# Altium PCB 2015PCB1.PcbDoc
Units mil, origin at the board's own origin, x right, y up, seen from the top; angles counter-clockwise.
Board outline 3930.03 x 2921.34 mil, 2 copper layers (Top Layer, Bottom Layer); 95 components, 169 nets, 484 pads, 42 vias.
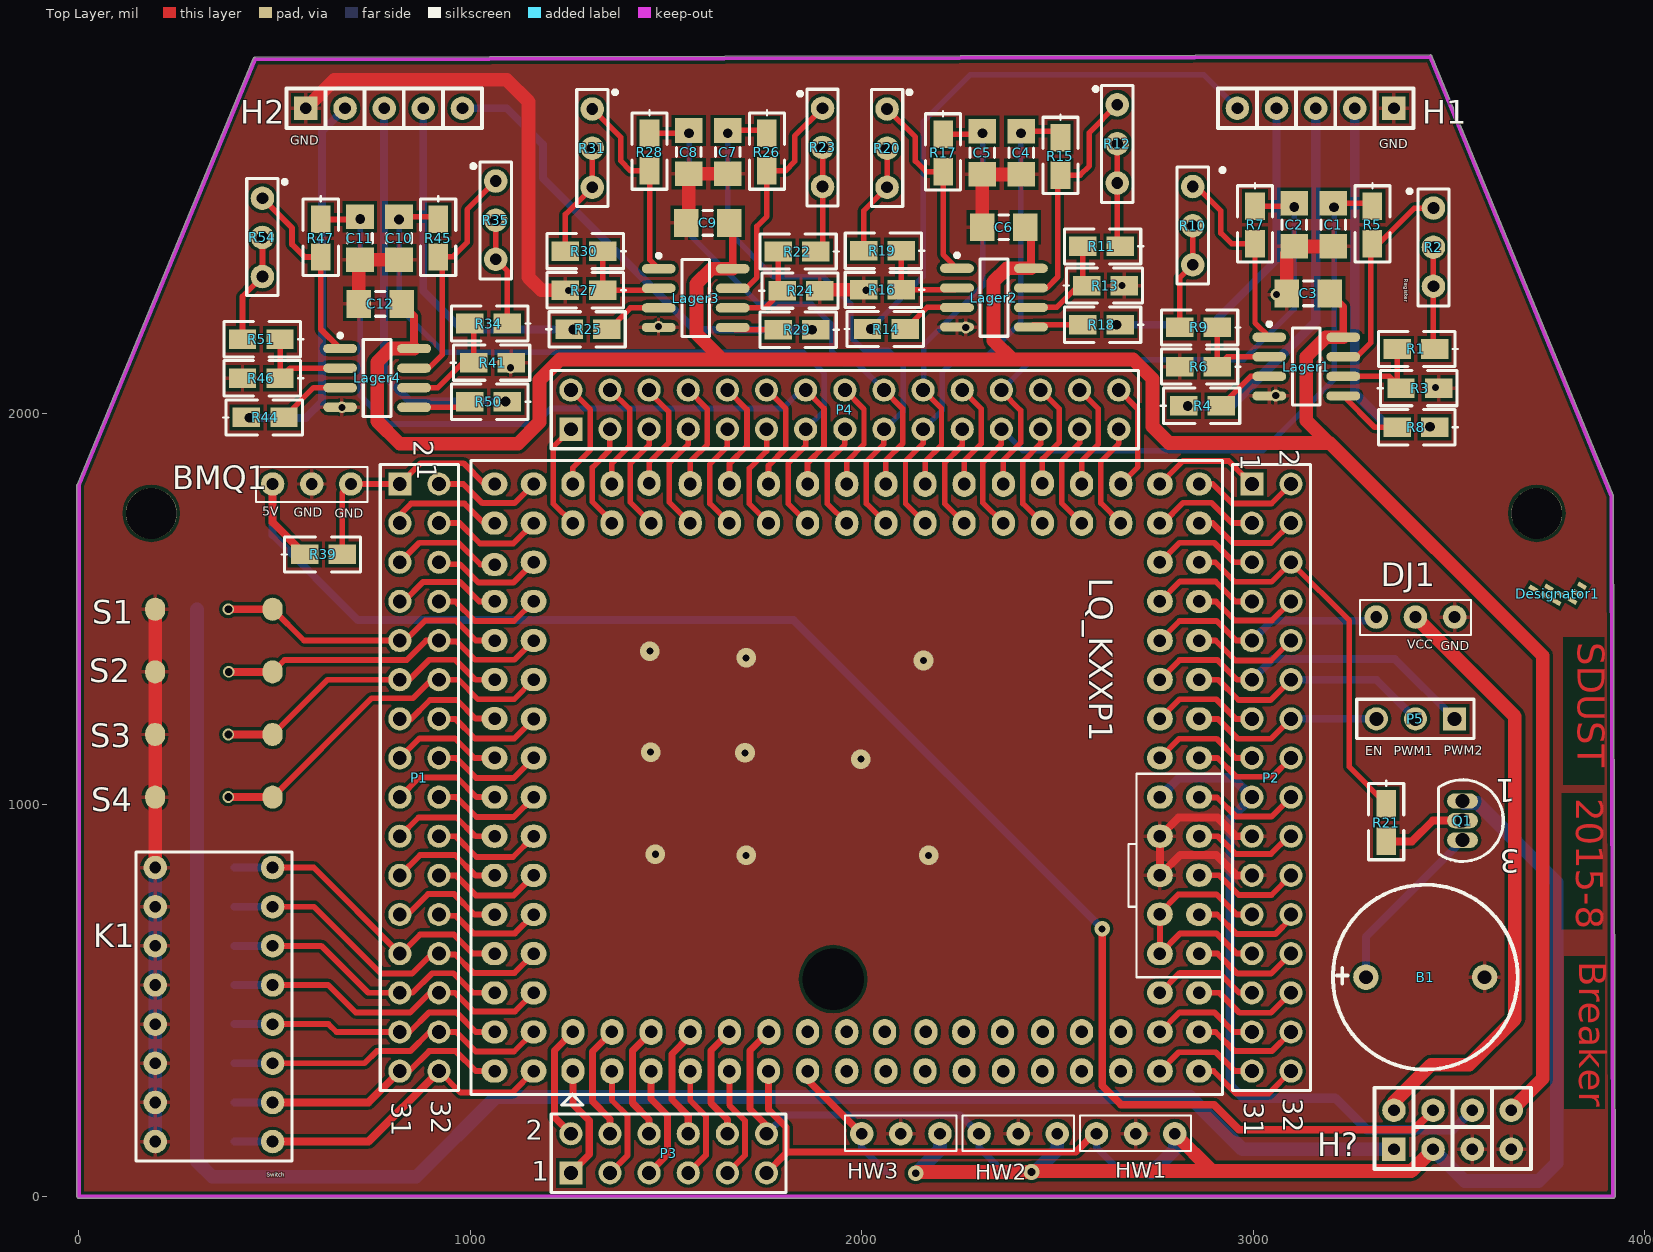
[diagram p0: Top Layer view]
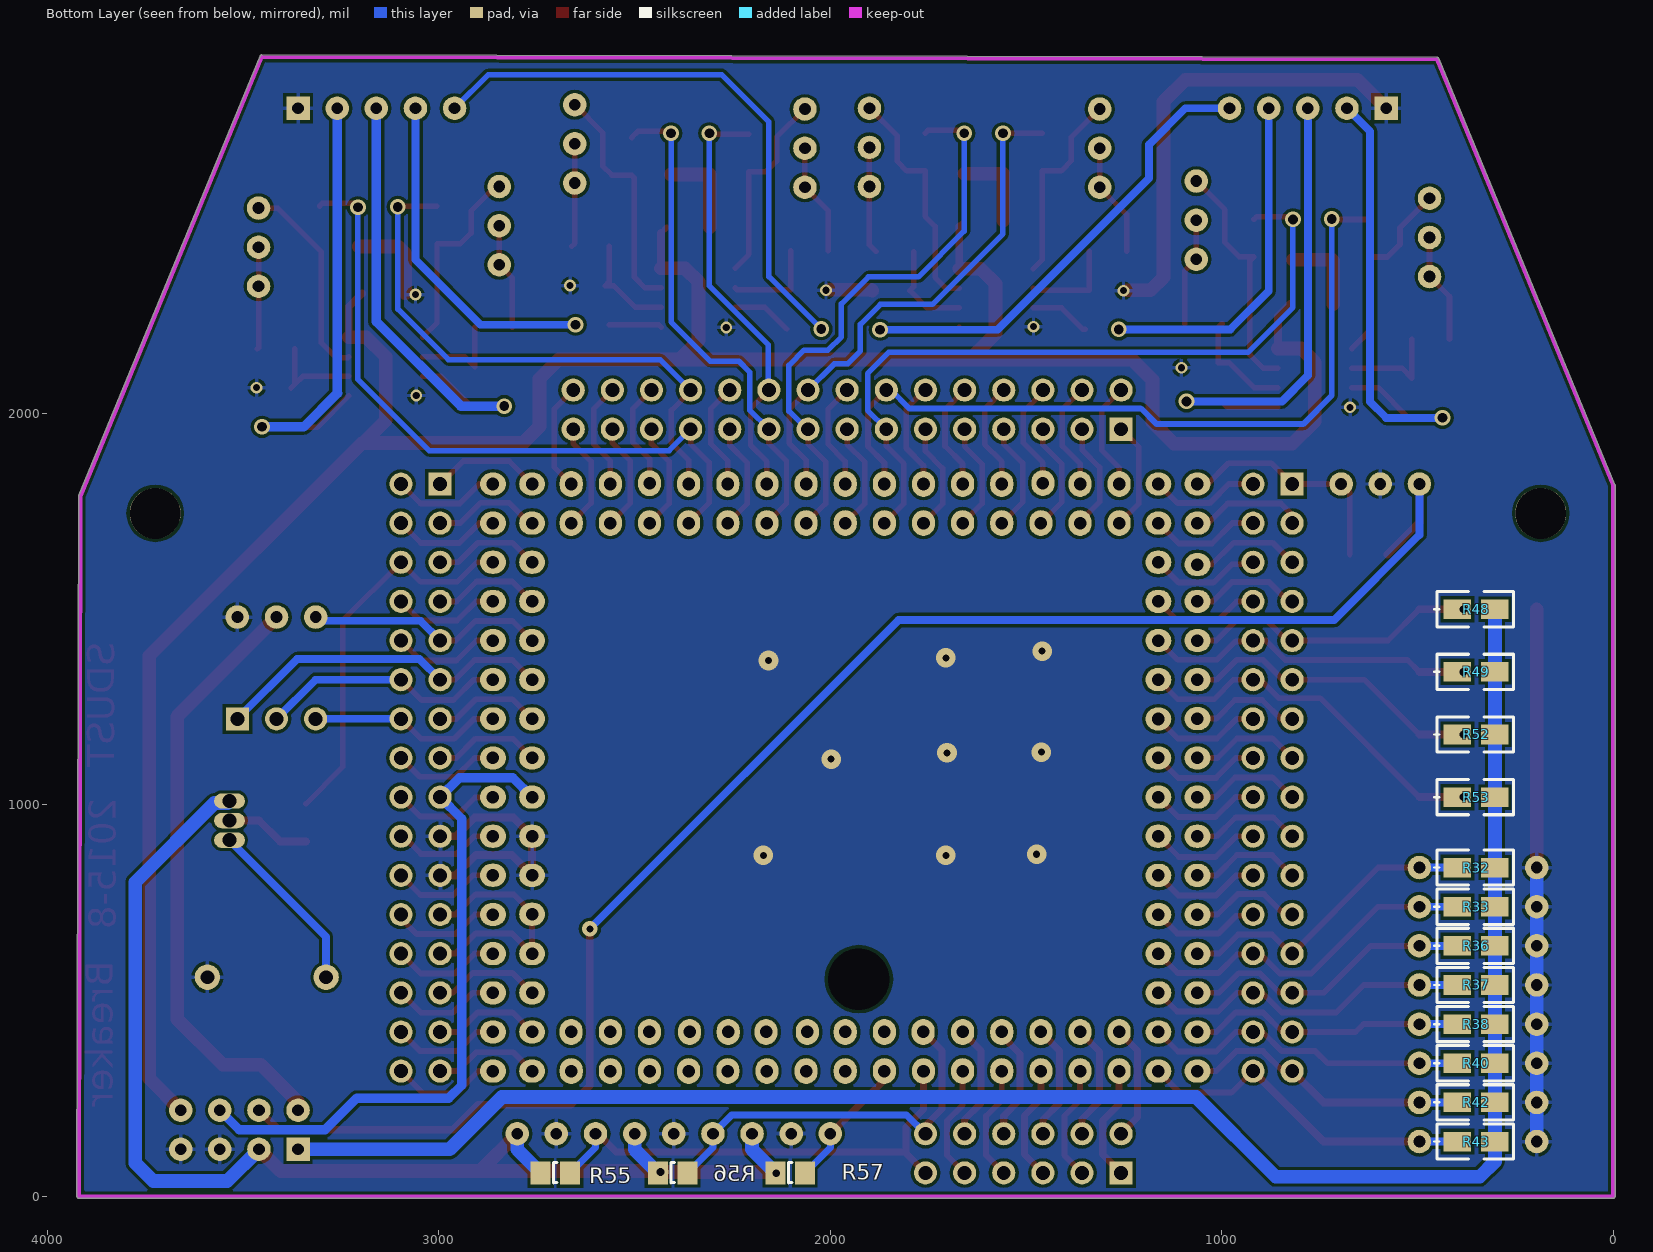
[diagram p1: Bottom Layer view, seen from below]

## Layer stack, top to bottom
Top Layer: signal copper 1.4
Dielectric: dielectric 12.6, FR-4, Dk 4.8
Bottom Layer: signal copper 1.4

## Board outline
-5.02,0 -5.02,1816.29 cw(c0,1816.29) -4.63,1818.21 445.37,2906.92 cw(c450,2905) 449.99,2910.02 3452.37,2916.32 cw(c3452.38,2911.31) 3457.02,2913.21 3457.02,2913.22 3457.02,2913.21 3920.34,1790.54 3920.35,1790.53 3920.34,1790.54 cw(c3915.71,1788.62) 3920.73,1788.63 cw(c3915.71,1788.62) 3920.73,1788.62 3920.73,1788.63 3925.02,0.01 cw(c3920,0) 3925.02,0 cw(c3920,0) 3920,-5.01 0,-5.01 cw(c0,0)

## Design rules (kind name [scope] priority, off if disabled: settings)
Clearance [All] p1: gap=8
ComponentClearance [All] p1: gap=2 collisioncheckmode=3 verticalgap=2 showdistances=FALSE
HoleSize [All] p1: absolutevalues=TRUE maxlimit=200 minlimit=1 maxpercent=80.000 minpercent=20.000
MinimumSolderMaskSliver [All] p1: minsoldermaskwidth=2
PlaneClearance [All] p1: clearance=18
PolygonConnect [All] p1: connectstyle=Relief reliefconductorwidth=10 reliefentries=4 polygonreliefangle="90 Angle"
RoutingVias [All] p1: holewidth=25 width=40 viastyle="Through Hole" minholewidth=18 minwidth=30 maxholewidth=25 maxwidth=50
SilkToSilkClearance [All] p1: silktosilkclearance=0
SilkscreenOverComponentPads [All] p1: minsilkscreentomaskgap=0
SolderMaskExpansion [All] p1: expansion=4
TestPointUsage [All] p1: valid=0 allowmultiple=FALSE
Testpoint [All] p1: side=15 testpointundercomponent=TRUE minsize=40 maxsize=100 preferedsize=60 minholesize=0 maxholesize=40 preferedholesize=32 testpointgrid=1 style=1023 order=0123456789
Width Width_signal_1 [InNetClass('signal_1')] p1: maxlimit=100 minlimit=10 preferedwidth=24
Width Width_signal [InNetClass('signal')] p2: maxlimit=20 minlimit=10 preferedwidth=18
Width Width_power [InNetClass('power')] p3: maxlimit=1000 minlimit=14 preferedwidth=35
18 further rules are at their usual default settings.

## Components (designator, comment, footprint, x,y, rotation, side; value= is the part's Value field where it differs from the comment)
B1 "BELL" bell 3440,560 r0 top
BMQ1 "HEADER" 干簧管 495,1820 r0 top
C1 "Cap" PCBComponent_1 3205,2427 r180 top
C2 "Cap" PCBComponent_1 3105,2427 r180 top
C3 "Cap" PCBComponent_1 3196,2307 r270 top
C4 "Cap" PCBComponent_1 2408,2611 r180 top
C5 "Cap" PCBComponent_1 2308,2611 r180 top
C6 "Cap" PCBComponent_1 2418,2476 r270 top
C7 "Cap" PCBComponent_1 1658,2613 r180 top
C8 "Cap" PCBComponent_1 1558,2613 r180 top
C9 "Cap" PCBComponent_1 1662,2487 r270 top
C10 "Cap" PCBComponent_1 818,2393 r180 top
C11 "Cap" PCBComponent_1 718,2393 r180 top
C12 "Cap" PCBComponent_1 825,2280 r270 top
Designator1 "Comment" FREESCALE 3840,1560 r270 top
DJ1 "HEADER" 干簧管 3315,1480 r0 top
H1 "HEADER" HEADER5 3360,2780 r180 top
H2 "HEADER" HEADER5 580,2780 r0 top
H? "HEADER4X2" HEADER4X2 3360,120 r0 top
HW1 "HEADER" 干簧管 2800,160 r180 top
HW2 "HEADER" 干簧管 2500,160 r180 top
HW3 "HEADER" 干簧管 2200,160 r180 top
K1 "拨码开关_8" 拨码开关 195,840 r0 top
Lager1 "2462" SOIC127P600X175-8N 3136,2120 r0 top
Lager2 "2462" SOIC127P600X175-8N 2338,2296 r0 top
Lager3 "2462" SOIC127P600X175-8N 1576,2295 r0 top
Lager4 "2462" SOIC127P600X175-8N 762,2091 r0 top
LQ_KXXP1 "LQ_KXXP144-SYSVG" LQ_KXXP144-SYSVG 1262,320 r0 top
P1 "Header 16X2" HDR2X16 820,1820 r270 top
P2 "Header 16X2" HDR2X16 2997,1820 r270 top
P3 "Header 6X2A" HDR2X6_CEN 1257,60 r0 top
P4 "Header 15X2A" HDR2X15_CEN 1257,1960 r0 top
P5 "Header 3" HDR1X3 3515,1220 r180 top
Q1 "NPN" TO-226 3535,960 r180 top
R1 "Res2" 0805#1 3461,2165 r180 top
R2 "47K" 精密可调电位器 3461,2525 r270 top
R3 "Res2" 0805#1 3381,2065 r0 top
R4 "Res2" 0805#1 2826,2020 r0 top
R5 "Res2" 0805#1 3305,2527 r270 top
R6 "Res2" 0805#1 2906,2120 r180 top
R7 "Res2" 0805#1 3005,2527 r270 top
R8 "Res2" 0805#1 3461,1965 r180 top
R9 "Res2" 0805#1 2906,2220 r180 top
R10 "47K" 精密可调电位器 2846,2380 r90 top
R11 "Res2" 0805#1 2658,2427 r180 top
R12 "47K" 精密可调电位器 2653,2789 r270 top
R13 "Res2" 0805#1 2578,2327 r0 top
R14 "Res2" 0805#1 2018,2216 r0 top
R15 "Res2" 0805#1 2508,2702 r270 top
R16 "Res2" 0805#1 2098,2316 r180 top
R17 "Res2" 0805#1 2208,2711 r270 top
R18 "Res2" 0805#1 2658,2227 r180 top
R19 "Res2" 0805#1 2098,2416 r180 top
R20 "47K" 精密可调电位器 2065,2578 r90 top
R21 "Res2" 0805#1 3340,1000 r270 top
R22 "Res2" 0805#1 1880,2414 r180 top
R23 "47K" 精密可调电位器 1900,2780 r270 top
R24 "Res2" 0805#1 1800,2314 r0 top
R25 "Res2" 0805#1 1256,2215 r0 top
R26 "Res2" 0805#1 1758,2713 r270 top
R27 "Res2" 0805#1 1336,2315 r180 top
R28 "Res2" 0805#1 1458,2713 r270 top
R29 "Res2" 0805#1 1880,2214 r180 top
R30 "Res2" 0805#1 1336,2415 r180 top
R31 "47K" 精密可调电位器 1312,2578 r90 top
R32 "Res2" 0805#1 395,840 r180 bottom
R33 "Res2" 0805#1 395,740 r180 bottom
R34 "Res2" 0805#1 1092,2230 r180 top
R35 "47K" 精密可调电位器 1065,2594 r270 top
R36 "Res2" 0805#1 395,640 r180 bottom
R37 "Res2" 0805#1 395,540 r180 bottom
R38 "Res2" 0805#1 395,440 r180 bottom
R39 "RES" 0805#1 580,1640 r0 top
R40 "Res2" 0805#1 395,340 r180 bottom
R41 "Res2" 0805#1 1012,2130 r0 top
R42 "Res2" 0805#1 395,240 r180 bottom
R43 "Res2" 0805#1 395,140 r180 bottom
R44 "Res2" 0805#1 431,1990 r0 top
R45 "Res2" 0805#1 918,2493 r270 top
R46 "Res2" 0805#1 511,2090 r180 top
R47 "Res2" 0805#1 618,2493 r270 top
R48 "Res2" 0805#1 395,1500 r180 bottom
R49 "Res2" 0805#1 395,1340 r180 bottom
R50 "Res2" 0805#1 1092,2030 r180 top
R51 "Res2" 0805#1 511,2190 r180 top
R52 "Res2" 0805#1 395,1180 r180 bottom
R53 "Res2" 0805#1 395,1020 r180 bottom
R54 "47K" 精密可调电位器 469,2350 r90 top
R55 "RES" 0805#2 2740,60 r180 bottom
R56 "RES" 0805#2 2440,60 r180 bottom
R57 "RES" 0805#2 2140,60 r180 bottom
S1 "SW-PB" 2012[0805] 455,1440 r0 top
S2 "SW-PB" 2012[0805] 455,1280 r0 top
S3 "SW-PB" 2012[0805] 455,1120 r0 top
S4 "SW-PB" 2012[0805] 455,960 r0 top

## Footprints (in the part's own frame and the unit in brackets; to place one, negate y for a bottom-side part, rotate by r counter-clockwise, add the part's x,y. Pads: shape width x height; smd on the part's side, far side on the other; paste and mask are expansions set on the pad)
0805#1 [mil]
  rect 70x50 smd: 1(-3,0) 2(93,0)
  silkscreen extent -62,-45 140,45
0805#2 [mil]
  rect 51.18x59.05 smd: 1(0,0) 2(74.8,0)
  silkscreen extent 33,-25 41,26
2012[0805] [mil] "Chip Resistor; Body 2.0 x 1.3 mm (LxW typ)"
  oval 51.18x59.06 smd: 1(-260,60) 2(40,60)
bell [mil]
  round 65 hole 35: 1(-151.57,0) 2(151.57,0)
  silkscreen extent -236,-236 236,236
FREESCALE [mm]
  rect 0.6x0.3 smd rot 60: 0(0,0) 1(0.475,-0.3) 2(0.975,-0.6) 3(0.55,-1.35) 4(1.05,-1.65) 5(0.125,-2.125) 6(0.625,-2.4) 7(0.2,-3.15)
HDR1X3 [mm] "Connector; Header; 3 Position"
  rect 1.5x1.5 hole 0.9: 1(0,0)
  round 1.5 hole 0.9: 2(2.54,0) 3(5.08,0)
  silkscreen extent -1.27,-1.27 6.35,1.27
HDR2X6_CEN [mm] "Connector; Header; 6x2 Position"
  rect 1.5x1.5 hole 0.9: 1(0,0)
  round 1.5 hole 0.9: 2(2.54,0) 3(5.08,0) 4(7.62,0) 5(10.16,0) 6(12.7,0) 7(0,2.54) 8(2.54,2.54) 9(5.08,2.54) 10(7.62,2.54) 11(10.16,2.54) 12(12.7,2.54)
  silkscreen extent -1.27,-1.27 13.97,3.81
HDR2X15_CEN [mm] "Connector; Header; 15x2 Position"
  rect 1.5x1.5 hole 0.9: 1(0,0)
  round 1.5 hole 0.9: 2(2.54,0) 3(5.08,0) 4(7.62,0) 5(10.16,0) 6(12.7,0) 7(15.24,0) 8(17.78,0) 9(20.32,0) 10(22.86,0) 11(25.4,0) 12(27.94,0) 13(30.48,0) 14(33.02,0) 15(35.56,0) 16(0,2.54) 17(2.54,2.54) 18(5.08,2.54) 19(7.62,2.54) 20(10.16,2.54) 21(12.7,2.54) 22(15.24,2.54) 23(17.78,2.54) 24(20.32,2.54) 25(22.86,2.54) 26(25.4,2.54) 27(27.94,2.54) 28(30.48,2.54) 29(33.02,2.54) 30(35.56,2.54)
  silkscreen extent -1.27,-1.27 36.83,3.81
HDR2X16 [mm] "Connector; Header; 16x2 Position"
  rect 1.5x1.5 hole 0.9: 1(0,0)
  round 1.5 hole 0.9: 2(0,2.54) 3(2.54,0) 4(2.54,2.54) 5(5.08,0) 6(5.08,2.54) 7(7.62,0) 8(7.62,2.54) 9(10.16,0) 10(10.16,2.54) 11(12.7,0) 12(12.7,2.54) 13(15.24,0) 14(15.24,2.54) 15(17.78,0) 16(17.78,2.54) 17(20.32,0) 18(20.32,2.54) 19(22.86,0) 20(22.86,2.54) 21(25.4,0) 22(25.4,2.54) 23(27.94,0) 24(27.94,2.54) 25(30.48,0) 26(30.48,2.54) 27(33.02,0) 28(33.02,2.54) 29(35.56,0) 30(35.56,2.54) 31(38.1,0) 32(38.1,2.54)
  silkscreen extent -1.27,-1.27 39.37,3.81
HEADER4X2 [mil]
  rect 60x60 hole 30: 1(0,0)
  round 60 hole 30: 2(100,0) 3(200,0) 4(300,0) 5(300,100) 6(200,100) 7(100,100) 8(0,100)
  silkscreen extent -50,-50 350,157
HEADER5 [mil]
  rect 60x60 hole 30: 1(0,0)
  round 60 hole 30: 2(100,0) 3(200,0) 4(300,0) 5(400,0)
  silkscreen extent -50,-50 450,50
LQ_KXXP144-SYSVG [mil]
  oval 59x66 hole 32: 1(0,0) 2(0,100) 3(100,0) 4(100,100) 5(200,0) 6(200,100) 7(300,0) 8(300,100) 9(400,0) 10(400,100) 11(500,0) 12(500.79,100) 13(600,0) 14(600,100) 15(700,0) 16(700,100) 17(800,0) 18(796.85,100) 19(900,0) 20(902.36,100) 21(1000,0) 22(998.82,100) 23(1100,0) 24(1097.64,100) 25(1200,0) 26(1200.39,100) 27(1300,0) 28(1300,100) 29(1400,0) 30(1400.39,100) 63(1400,1500) 64(1400,1400) 65(1300,1500) 66(1300,1400) 67(1200,1501.97) 68(1200,1400) 69(1100,1500) 70(1100,1400) 71(1000,1500) 72(1000,1400) 73(900,1500) 74(900,1400) 75(800,1500) 76(800,1400) 77(700,1500) 78(700,1400) 79(600,1500) 80(600,1400) 81(500,1500) 82(500,1400) 83(400,1500) 84(400,1400) 85(300,1500) 86(300,1400) 87(194.88,1502.36) 88(200,1400) 89(100,1500) 90(100,1400) 91(0,1500) 92(0,1400)
  oval 66x59 hole 32: 31(1500,0) 32(1600,0) 33(1500,100) 34(1600,100) 35(1500,200) 36(1600,200) 37(1500,300) 38(1600,300) 39(1500,400.79) 40(1600,400) 41(1500,500) 42(1600,500.39) 43(1500,600) 44(1600,600) 45(1500,700) 46(1600,700) 47(1500,800) 48(1600,800) 49(1500,900) 50(1600,900) 51(1500,1000) 52(1600,1000) 53(1500,1100) 54(1600,1100) 55(1500,1200) 56(1600,1200) 57(1500,1300) 58(1600,1300) 59(1500,1400) 60(1600,1400) 61(1500,1500) 62(1600,1500) 93(-100,1500) 94(-200,1500) 95(-100,1400) 96(-200,1400) 97(-100,1300) 98(-200,1294.09) 99(-100,1200) 100(-200,1200) 101(-100,1100) 102(-200,1100) 103(-100,1000) 104(-200,1000) 105(-100,899.61) 106(-200,900.39) 107(-100,800) 108(-200,800) 109(-100,700) 110(-200,700) 111(-100,600) 112(-200,600) 113(-100,500) 114(-200,500) 115(-100,400) 116(-200,400) 117(-100,300) 118(-200,300) 119(-100,200) 120(-200,200) 121(-100,100) 122(-200,100) 123(-100,0) 124(-200,0)
  silkscreen extent -260,-87 1660,1560
PCBComponent_1 [mm]
  rect 1.8x1.6 smd: 1(0,0) 2(0,-2.8)
  silkscreen extent -0.8,-1.7 0.8,-1.1
SOIC127P600X175-8N [mm] "SOIC, 8-Leads, Body 4.90x3.90mm, Pitch 1.27mm, IPC Medium Density"
  oval 2.2x0.6 smd: 1(-2.4,1.905) 2(-2.4,0.635) 3(-2.4,-0.635) 4(-2.4,-1.905) 5(2.4,-1.905) 6(2.4,-0.635) 7(2.4,0.635) 8(2.4,1.905)
  silkscreen extent -2.52,-2.5 0.9,2.88, body extent -2,-2.5 2,2.5, height 1.75
TO-226 [mm] "TO, Flat Index; 3 In-Line, Axial Leads; Body Dia. 4.8mm; Leads 0.55 x 0.51 mm (max)"
  oval 2x1 hole 0.9: 1(0,-1.27) 2(0,0) 3(0,1.27)
  silkscreen extent -2.65,-2.65 1.55,2.65
干簧管 [mil]
  round 60 hole 30: 1(0,0) 2(100,0) 3(200,0)
  silkscreen extent -42,-46 242,44
拨码开关 [mil]
  round 60 hole 30: 1(0,0) 2(0,-100) 3(0,-200) 4(0,-300) 5(0,-400) 6(0,-500) 7(0,-600) 8(0,-700) 9(300,-700) 10(300,-600) 11(300,-500) 12(300,-400) 13(300,-300) 14(300,-200) 15(300,-100) 16(300,0)
  silkscreen extent -49,-750 350,40
精密可调电位器 [mil]
  round 60 hole 30: 1(0,0) 2(100,0) 3(200,0)
  silkscreen extent -49,-40 250,40

## Part data
B1: library part bell, "直插蜂鸣器"
BMQ1 DJ1 HW1 HW2 HW3: library part HEADER3
C1 C2 C3 C4 C5 C6 C7 C8 C9 C10 C11 C12: "Capacitor"
H1 H2: library part HEADER5, "CCD接口"
Lager1 Lager2 Lager3 Lager4: library part BTS7970B_3, "驱动"
P1 P2: "Header, 16-Pin, Dual row"
P3: library part "Header 15X2", "Header, 15-Pin, Dual row"
P4: "Header, 15-Pin, Dual row"
P5: "Header, 3-Pin"
Q1: "NPN Bipolar Transistor"
R1 R3 R4 R5 R6 R7 R8 R9 R11 R13 R14 R15 R16 R17 R18 R19 R21 R22 R24 R25 R26 R27 R28 R29 R30 R32 R33 R34 R36 R37 R38 R40 R41 R42 R43 R44 R45 R46 R47 R48 R49 R50 R51 R52 R53: "Resistor"
R2 R10 R12 R20 R23 R31 R35 R54: library part 精密可调电位器
R39 R55 R56 R57: library part 0805-电阻
S1 S2 S3 S4: "Switch"

## Free pads (board coordinates)
  round 129.92 hole 129.92: 0(185,1745) 1(3725,1745)
  round 129.92 hole 157.48: 6(1927,555)

## Via types
v1: diameter 40, hole 25, Top Layer to Bottom Layer, 16 vias
v2: diameter 30, hole 18, Top Layer to Bottom Layer, 10 vias
v3: diameter 50, hole 18, Top Layer to Bottom Layer, 9 vias
v4: diameter 30, hole 20, Top Layer to Bottom Layer, 4 vias
v5: diameter 40, hole 20, Top Layer to Bottom Layer, 2 vias
v6: diameter 40, hole 18, Top Layer to Bottom Layer, 1 vias

## Nets (pads, with @x,y where several pads share a name; then routed paths per layer and width w, separated by ;. In a path a pad name is that pad's centre, name@x,y a point inside that pad or via, vN(x,y) a via of type N, cw(c..) or ccw(c..) an arc to the next point about the centre after c; other vN are vias at no path point)
0M1: LQ_KXXP1.18
0M3: LQ_KXXP1.24
0P1: LQ_KXXP1.17
0P3: LQ_KXXP1.23
0S16: LQ_KXXP1.27
1M1: LQ_KXXP1.20
1M3: LQ_KXXP1.22
1P1: LQ_KXXP1.19
1P3: LQ_KXXP1.21
1S16: LQ_KXXP1.26
1S18: LQ_KXXP1.28
3.3V: H?.1 R32.2 R33.2 R36.2 R37.2 R38.2 R40.2 R42.2 R43.2 R48.2 R49.2 R52.2 R53.2 | length 5825.2
  Bottom Layer w24: R43.2 R42.2 R40.2 R38.2 R37.2 R36.2 R33.2 R32.2 R53.2 R52.2 R49.2
  Bottom Layer w35: R48.2 R49.2 R52.2 R53.2 R32.2 R33.2 R36.2 R37.2 R38.2 R40.2 R42.2 R43.2 302,89 341,50 862,50 1066,254 2839,254 2973,120 H?.1
3.3V(D): H?.6 LQ_KXXP1.45 P2.17 | length 1746.2
  Top Layer w24: LQ_KXXP1.45 2773,1020 2774,1021 LQ_KXXP1.45@2774,1034
  Bottom Layer w24: LQ_KXXP1.45 2811.5,1069.5 2947.5,1069.5 P2.17 2941.97,964.97 2941.97,284.03 2975,251 3210,251 3291,170 3510,170 H?.6
5V(3): H?.2 HW1.1 HW2.1 HW3.1 Q1.1 R55.1 R56.1 R57.1 | length 3269
  Top Layer w35: v5(2138,59) 2141,62 v5(2434,62) ; v5@2434,64.5 2895.5,64.5 ; HW1.1 2895.5,64.5 ; H?.2 3404.5,64.5 2895.5,64.5
  Bottom Layer w35: R57.1 2200,120 HW3.1 ; R56.1 2500,120 HW2.1 ; R55.1 2800,120 HW1.1 ; H?.2 3541,39 3730,39 3776,85 3776,802.59 3573.4,1005.19 3539.81,1005.19 Q1.1
5V(B): BMQ1.1 H?.7 R39.1 | length 4194.2
  Top Layer w20: BMQ1.1 495,1722 R39.1 ; v6(2614.5,683.5) 2614.5,282.5 2663,234 2900,234 2964,170 3410,170 H?.7
  Bottom Layer w20: BMQ1.1 495,1690 712.53,1472.47 1825.53,1472.47 v6(2614.5,683.5)
5V(S): C3.1 C6.1 C9.1 C12.1 H?.5 Lager1.8 Lager2.8 Lager3.8 Lager4.8 | length 6494.2
  Top Layer w14: C9.1 C9.1@1670.49,2478.51 ; C6.1 C6.1@2432.49,2461.51
  Top Layer w20: C12.1 856.49,2248.51 Lager4.8 ; Lager3.8 C9.1@1670.49,2478.51 ; Lager2.8 C6.1@2432.49,2461.51 ; C3.1 3230.49,2272.51 Lager1.8
  Top Layer w35: Lager4.8 797,2166 762,2131 762,1981 820,1923 1122,1923 1177,1978 1177,2086 1229,2138 1644,2138 ; Lager3.8 1616,2370 1578,2332 1578,2204 1644,2138 ; Lager2.8 2371,2371 2337,2337 2337,2186 2385,2138 ; Lager1.8 3186,2195 3136,2145 3136,1982 3193,1925 ; H?.5 3660,221 3740,301 3740,1381 3196,1925 3193,1925 ; 1644,2138 2385,2138 ; 2385,2138 2694,2138 2743,2089 2743,1967 2785,1925 3193,1925
ADJ: DJ1.2 H?.8 | length 1550
  Top Layer w35: H?.8 3360,241 3455,336 3552,336 3669,453 3669,1226 DJ1.2
BAT: LQ_KXXP1.31 P2.31 | length 274.8
  Top Layer w15: LQ_KXXP1.31 2810,368 2905,368 2953,320 P2.31
DA0: LQ_KXXP1.29
DA1: LQ_KXXP1.30
DM: LQ_KXXP1.15
DP: LQ_KXXP1.14
GND: B1.2 BMQ1.2 C1.1 C2.1 C3.2 C4.1 C5.1 C6.2 C7.1 C8.1 C9.2 C10.1 C11.1 C12.2 DJ1.3 H1.1 H2.1 H?.3 H?.4 HW1.2 HW2.2 HW3.2 K1.1 K1.2 K1.3 K1.4 K1.5 K1.6 K1.7 K1.8 Lager1.4 Lager2.4 Lager3.4 Lager4.4 LQ_KXXP1.41 LQ_KXXP1.43 P2.19 P2.21 R3.2 R6.2 R13.2 R16.2 R24.2 R27.2 R41.2 R46.2 S1.1 S2.1 S3.1 S4.1 | length 4209.6
  Top Layer w20: P2.21 2958,820 2906,872 2814,872 LQ_KXXP1.41 LQ_KXXP1.43 2809.5,967.5 2909,967.5 2956.5,920 P2.19
  Top Layer w35: K1.1 S4.1 S3.1 S2.1 S1.1 ; H2.1 653,2853 1093,2853 1149,2797 1149,2348 1182,2315 R27.2 ; C12.2 C11.1@714.76,2389.76 ; C11.1 C10.1 ; C9.2@1558,2493.24 C8.1 C7.1 ; R24.2 1895,2316 R16.2 ; C6.2@2308,2476.24 C5.1 C4.1 ; C3.2 3085.76,2407.76 C2.1 C1.1
  Bottom Layer w20: BMQ1.2@595,1807 BMQ1.2
  Bottom Layer w35: K1.8 K1.7 K1.6 K1.5 K1.4 K1.3 K1.2 K1.1
  other v2: 672,2016 3058,2046 3466,2066 1103,2117 2266,2220 1481,2222 3060,2304 1251,2314 2011,2315 2665,2327
  other v3: 1705,871 2171,871 1473,874 1998,1117 1702,1133 1461,1135 2158,1369 1705,1376 1459,1393
NC: LQ_KXXP1.37 LQ_KXXP1.39 P2.23 P2.25 | length 665.5
  Top Layer w15: LQ_KXXP1.39 LQ_KXXP1.37 2814,672 2906,672 2958,620 P2.25 ; LQ_KXXP1.39@2762,724 2809,771 2907,771 2958,720 P2.23
  Top Layer w20: LQ_KXXP1.39@2762,724 LQ_KXXP1.39 LQ_KXXP1.39@2769.79,720.79
NetB1_1: B1.1 Q1.3 | length 452.1
  Bottom Layer w20: B1.1 3288.43,663.43 Q1.3
NetH1_2: H1.2 R8.1 | length 957.2
  Bottom Layer w24: H1.2 3260,2053.33 3258.83,2052.17 3345,1966 v1(3452,1966)
NetH1_3: H1.3 R4.1 | length 961.5
  Bottom Layer w24: v1(2833,2019) 2944,2019 3160,2235 H1.3
NetH1_4: H1.4 R18.1 | length 864.8
  Bottom Layer w20: v1(2651,2227) 2894,2227 3060,2393 H1.4
NetH1_5: H1.5 R14.1 | length 1473.2
  Bottom Layer w14: v1(2023,2216) 2157,2350 2157,2745 2278,2866 2874,2866 H1.5
NetH2_2: H2.2 R44.1 | length 976.4
  Bottom Layer w20: v1(436,1989) 580,1989 621,2030 621,2721 H2.2
NetH2_3: H2.3 R50.1 | length 1020.3
  Bottom Layer w20: H2.3 780,2097 846,2031 v1(1090,2031)
NetH2_4: H2.4 R25.1 | length 890.6
  Bottom Layer w20: H2.4 880,2313 978,2215 v1(1263,2215)
NetH2_5: H2.5 R29.1 | length 1177.8
  Bottom Layer w20: H2.5 1093,2780 1186,2687 1186,2601 1573,2214 v1(1873,2214)
NetLager1_1: Lager1.1 R7.2 R10.3 | length 507
  Top Layer w14: R10.3 2856,2580 2918,2518 2918,2461 2945,2434 R7.2 3005,2231.51 Lager1.1
NetLager1_2: Lager1.2 R6.1 R9.1 | length 242.9
  Top Layer w14: R9.1 R6.1 2934,2145 Lager1.2
NetLager1_3: Lager1.3 R4.2 | length 153.6
  Top Layer w14: R4.2 2994,2095 Lager1.3
NetLager1_5: Lager1.5 R8.2 | length 170.6
  Top Layer w14: Lager1.5 3310.49,1965 R8.2
NetLager1_6: Lager1.6 R1.2 R3.1 | length 249.9
  Top Layer w14: Lager1.6 3348,2095 R3.1@3368,2075 ; R1.2 R3.1@3368,2075 ; R3.1 R3.1@3368,2075
NetLager1_7: Lager1.7 R2.1 R5.2 | length 526.9
  Top Layer w14: Lager1.7 3233.49,2142 3262,2142 3301,2181 3301,2414 3412,2525 R2.1
NetLager2_1: Lager2.1 R17.2 R20.3 | length 506.7
  Top Layer w14: R20.3 2137,2706 2137,2645 2164,2618 R17.2 2208,2406.51 Lager2.1
NetLager2_2: Lager2.2 R16.1 R19.1 | length 244.6
  Top Layer w14: R19.1 R16.1 2238.51,2316 Lager2.2
NetLager2_3: Lager2.3 R14.2 | length 155.3
  Top Layer w14: R14.2 2112,2216 2167,2271 Lager2.3
NetLager2_5: Lager2.5 R18.2 | length 135
  Top Layer w14: Lager2.5 2438.49,2227 R18.2
NetLager2_6: Lager2.6 R11.2 R13.1 | length 269.9
  Top Layer w14: Lager2.6 2498,2271 2554,2327 R13.1 2565,2337 R11.2
NetLager2_7: Lager2.7 R12.1 R15.2 | length 612.4
  Top Layer w14: Lager2.7 2473,2321 2501,2349 2501,2602 R15.2 2558,2609 2582,2633 2582,2718 R12.1
NetLager3_1: Lager3.1 R28.2 R31.3 | length 506.3
  Top Layer w14: R31.3 1384,2706 1384,2646 1410,2620 R28.2 1458,2393.51 Lager3.1
NetLager3_2: Lager3.2 R27.1 R30.1 | length 244.6
  Top Layer w14: R30.1 R27.1 1476.51,2315 Lager3.2
NetLager3_3: Lager3.3 R25.2 | length 155.3
  Top Layer w14: R25.2 1354,2215 1409,2270 Lager3.3
NetLager3_5: Lager3.5 R29.2 | length 119
  Top Layer w14: Lager3.5 1676.49,2214 R29.2
NetLager3_6: Lager3.6 R22.2 R24.1 | length 248.9
  Top Layer w14: Lager3.6 1753,2270 R24.1 1787,2324 R22.2
NetLager3_7: Lager3.7 R23.1 R26.2 | length 602.2
  Top Layer w14: Lager3.7 1704,2320 1732,2348 1732,2478 1758,2504 R26.2 1805,2620 1829,2644 1829,2709 R23.1
NetLager4_1: Lager4.1 R47.2 R54.3 | length 490.2
  Top Layer w15: R54.3 545,2474 545,2432 577,2400 R47.2 618,2215.51 Lager4.1
NetLager4_2: Lager4.2 R46.1 R51.1 | length 264.3
  Top Layer w14: R51.1 R46.1 540,2116 Lager4.2
NetLager4_3: Lager4.3 R44.2 | length 175
  Top Layer w14: R44.2 600,2066 Lager4.3
NetLager4_5: Lager4.5 R50.2 | length 148.3
  Top Layer w14: Lager4.5 985,2016 R50.2
NetLager4_6: Lager4.6 R34.2 R41.1 | length 283.2
  Top Layer w14: Lager4.6 917,2066 981,2130 R41.1 1009,2220 R34.2
NetLager4_7: Lager4.7 R35.1 R45.2 | length 616.3
  Top Layer w14: Lager4.7 894,2116 928,2150 928,2390 R45.2 955,2400 992,2437 992,2521 R35.1
NetQ1_2: Q1.2 R21.2 | length 217
  Top Layer w20: R21.2 3406,907 3459,960 Q1.2
NetR1_1: R1.1 R2.2 R2.3 | length 261.2
  Top Layer w14: R2.2 R2.3 3461,2168 R1.1
NetR9_2: R9.2 R10.1 R10.2 | length 273.7
  Top Layer w14: R9.2 2813,2347 R10.1 R10.2
NetR11_1: R11.1 R12.2 R12.3 | length 265.3
  Top Layer w14: R12.2 R12.3 2653,2435 R11.1
NetR19_2: R19.2 R20.1 R20.2 | length 286.9
  Top Layer w14: R19.2 2005,2518 R20.1 R20.2
NetR22_1: R22.1 R23.2 R23.3 | length 273
  Top Layer w14: R22.1 1900,2431 R23.3 R23.2
NetR30_2: R30.2 R31.1 R31.2 | length 291.6
  Top Layer w14: R30.2 1243,2509 R31.1 R31.2
NetR34_1: R34.1 R35.2 R35.3 | length 276.4
  Top Layer w14: R35.2 R35.3 1095,2364 R34.1
NetR51_2: R51.2 R54.1 R54.2 | length 281.1
  Top Layer w15: R51.2 418,2299 R54.1 R54.2
PTA0: LQ_KXXP1.44 P2.20 | length 272.3
  Top Layer w15: LQ_KXXP1.44 2910,920 2955.03,874.97 3045.97,874.97 3091,920 P2.20
PTA1: LQ_KXXP1.40 P2.24 | length 282.3
  Top Layer w15: LQ_KXXP1.40 2908,720 2958,670 3057,670 3097,710 P2.24
PTA2: LQ_KXXP1.42 P2.22 | length 276.6
  Top Layer w15: LQ_KXXP1.42 2913,820.39 2963.39,770 3047,770 P2.22
PTA3: LQ_KXXP1.46 P2.18 | length 276.4
  Top Layer w15: LQ_KXXP1.46 2863,1019 2908,1019 2957,970 3047,970 P2.18
PTA4: LQ_KXXP1.47 P2.15 | length 275.6
  Top Layer w15: LQ_KXXP1.47 2811,1169 2907,1169 2956,1120 P2.15
PTA5: LQ_KXXP1.48 P2.16 | length 274.8
  Top Layer w15: LQ_KXXP1.48 2909,1120 2957,1072 3049,1072 P2.16
PTA6: LQ_KXXP1.49 P2.13 | length 276.4
  Top Layer w15: LQ_KXXP1.49 2812,1270 2906,1270 2956,1220 P2.13
PTA7(EN): LQ_KXXP1.50 P2.14 P5.3 | length 495.2
  Top Layer w15: LQ_KXXP1.50 2910,1220 2961,1169 3046,1169 P2.14
  Bottom Layer w20: P2.14 P5.3
PTA8: LQ_KXXP1.51 P2.11 P5.1 | length 879.4
  Top Layer w15: LQ_KXXP1.51 2812,1370 2909,1370 2959,1320 P2.11
  Bottom Layer w20: P2.11 3049.53,1372.53 3077.26,1372.53 3077.31,1372.47 3116.69,1372.47 3116.74,1372.53 3362.47,1372.53 P5.1
PTA9: LQ_KXXP1.52 P2.12 P5.2 | length 637.5
  Top Layer w15: LQ_KXXP1.52 2911,1320 2963,1268 3045,1268 P2.12
  Bottom Layer w20: P2.12 3315,1320 P5.2
PTA10: DJ1.1 LQ_KXXP1.53 P2.9 | length 619.3
  Top Layer w15: LQ_KXXP1.53 2812,1470 2907,1470 2957,1420 P2.9
  Bottom Layer w20: P2.9 3047.47,1470.47 3305.47,1470.47 DJ1.1
PTA11: LQ_KXXP1.54 P2.10 | length 277.2
  Top Layer w15: LQ_KXXP1.54 2904,1420 2955,1369 3046,1369 P2.10
PTA12: LQ_KXXP1.55 P2.7 | length 277.2
  Top Layer w15: LQ_KXXP1.55 2813,1571 2904,1571 2955,1520 P2.7
PTA13: LQ_KXXP1.56 P2.8 | length 275.6
  Top Layer w15: LQ_KXXP1.56 2905,1520 2954,1471 3048,1471 P2.8
PTA14: LQ_KXXP1.57 P2.5 | length 276.4
  Top Layer w15: LQ_KXXP1.57 2812,1670 2901,1670 2951,1620 P2.5
PTA15: LQ_KXXP1.58 P2.6 R21.1 | length 994.1
  Top Layer w14: LQ_KXXP1.58 2904,1620 2954,1570 3047,1570 P2.6 3246,1471 3246,1097 R21.1
PTA16: LQ_KXXP1.59 P2.3 | length 278.1
  Top Layer w15: LQ_KXXP1.59 2769,1720 2821,1772 2894,1772 2946,1720 P2.3
PTA17: LQ_KXXP1.60 P2.4 | length 277.2
  Top Layer w15: LQ_KXXP1.60 2897,1720 2948,1669 3046,1669 P2.4
PTA18: LQ_KXXP1.61 P2.1 | length 283.9
  Top Layer w15: LQ_KXXP1.61 2821,1879 2938,1879 P2.1
PTA19: LQ_KXXP1.62 P2.2 | length 276.4
  Top Layer w15: LQ_KXXP1.62 2897,1820 2947,1770 3047,1770 P2.2
PTA24: LQ_KXXP1.64 P4.15 | length 280.2
  Top Layer w14: P4.15 2657,1924 2611,1878 2611,1771 LQ_KXXP1.64
PTA25: LQ_KXXP1.63 P4.30 | length 278.5
  Top Layer w14: P4.30 2706,2011 2706,1864 LQ_KXXP1.63
PTA26: LQ_KXXP1.66 P4.14 | length 280.2
  Top Layer w14: P4.14 2557,1925 2511,1879 2511,1771 LQ_KXXP1.66
PTA27: LQ_KXXP1.65 P4.29 | length 277.7
  Top Layer w14: P4.29 2605,2012 2605,1922 2562,1879 LQ_KXXP1.65
PTA28: LQ_KXXP1.68 P4.13 | length 279.4
  Top Layer w14: P4.13 2457,1923 2412,1878 2412,1770 LQ_KXXP1.68
PTA29: LQ_KXXP1.67 P4.28 | length 275.7
  Top Layer w14: P4.28 2505,2012 2505,1927 2462,1884 LQ_KXXP1.67
PTB0: C1.2 LQ_KXXP1.70 P4.12 R5.1 | length 1772.2
  Top Layer w14: P4.12 2357,1922 2310,1875 2310,1772 LQ_KXXP1.70 ; C1.2 3207,2537.24 3297.76,2537.24 R5.1
  Bottom Layer w14: P4.12 2412,1905 3025,1905 3207,2087 v1(3207,2527)
PTB1: C2.2 LQ_KXXP1.69 P4.27 R7.1 | length 1476.3
  Top Layer w14: P4.27 2357,2057 2406,2008 2406,1925 2362,1881 LQ_KXXP1.69 ; R7.1 3097.76,2530 3100.38,2532.62 C2.2
  Bottom Layer w14: P4.27 2435,2138 2976,2138 3105,2267 v1(3105,2528)
PTB2: LQ_KXXP1.72 P4.11 | length 279.4
  Top Layer w14: P4.11 2257,1919 2212,1874 2212,1770 LQ_KXXP1.72
PTB3: LQ_KXXP1.71 P4.26 | length 279.1
  Top Layer w14: P4.26 2258,2060 2306,2012 2306,1923 2262,1879 LQ_KXXP1.71
PTB4: C4.2 LQ_KXXP1.74 P4.10 R15.1 | length 1288.4
  Top Layer w14: P4.10 2157,1924 2112,1879 2112,1770 LQ_KXXP1.74 ; C4.2 2491.76,2721.24 R15.1
  Bottom Layer w14: P4.10 2206,2009 2206,2106 2234,2134 2307,2134 2407,2234 v1(2407,2716)
PTB5: C5.2 LQ_KXXP1.73 P4.25 R17.1 | length 1104.2
  Top Layer w14: P4.25 2204,2013 2204,1919 2162,1877 LQ_KXXP1.73 ; R17.1 2300.76,2714 C5.2
  Bottom Layer w14: P4.25 2159,2062 2159,2176 2309,2326 2309,2717 v1@2308,2721.24
  other v1: 2309,2716
PTB6: C7.2 LQ_KXXP1.76 P4.9 R26.1 | length 1456.7
  Top Layer w14: C7.2 1750.76,2723.24 R26.1 ; P4.9 2057,1922 2012,1877 2012,1770 LQ_KXXP1.76
  Bottom Layer w14: v1(1658,2716) 1658,2466 1775,2349 1903,2349 1972,2280 1972,2196 2006,2162 2067,2162 2106,2123 2106,2006 2060,1960 P4.9
PTB7: C8.2 LQ_KXXP1.75 P4.24 R28.1 | length 1340.8
  Top Layer w14: R28.1 1550.76,2716 1554.88,2720.12 C8.2 ; P4.24 2105,2012 2105,1924 2062,1881 LQ_KXXP1.75
  Bottom Layer w14: v1(1559,2716) 1559,2459 1739,2279 1872,2279 1923,2228 1923,2160 1956,2127 1990,2127 P4.24
PTB8: LQ_KXXP1.78 P4.8 | length 279.4
  Top Layer w14: P4.8 1957,1921 1912,1876 1912,1770 LQ_KXXP1.78
PTB9: LQ_KXXP1.77 P4.23 | length 278.5
  Top Layer w14: P4.23 2006,2011 2006,1922 1962,1878 LQ_KXXP1.77
PTB10: C10.2 LQ_KXXP1.80 P4.7 R45.1 | length 1943.7
  Top Layer w14: C10.2@825.24,2496 C10.2 910.76,2503.24 R45.1 ; P4.7 1857,1917 1812,1872 1812,1770 LQ_KXXP1.80
  Bottom Layer w14: v1@825.24,2496 v1(818,2496) 818,2271 933,2156 1851,2156 1905,2102 1905,2008 P4.7
PTB11: C11.2 LQ_KXXP1.79 P4.22 R47.1 | length 2034.9
  Top Layer w15: R47.1 710.76,2496 715.38,2500.62 C11.2 ; P4.22 1904,2013 1904,1916 1862,1874 LQ_KXXP1.79
  Bottom Layer w15: v1(719,2497) 719,2046 792,1973 1166,1973 1205,2012 1208,2013 1798.06,2013 1845.06,2060 P4.22
PTB16: LQ_KXXP1.82 P4.6 | length 278.5
  Top Layer w14: P4.6 1757,1904 1713,1860 1713,1769 LQ_KXXP1.82
PTB17: LQ_KXXP1.81 P4.21 | length 279.7
  Top Layer w15: P4.21 1759,2060 1806,2013 1806,1911 1762,1867 LQ_KXXP1.81
PTB18: LQ_KXXP1.84 P4.5 | length 279.4
  Top Layer w14: P4.5 1657,1916 1612,1871 1612,1770 LQ_KXXP1.84
PTB19: LQ_KXXP1.83 P4.20 | length 279.4
  Top Layer w15: P4.20 1707,2010 1707,1917 1662,1872 LQ_KXXP1.83
PTB20: LQ_KXXP1.86 P4.4 | length 281.8
  Top Layer w14: P4.4 1557,1922 1509,1874 1509,1773 LQ_KXXP1.86
PTB21: LQ_KXXP1.85 P4.19 | length 278.5
  Top Layer w14: P4.19 1606,2011 1606,1921 1562,1877 LQ_KXXP1.85
PTB22: LQ_KXXP1.88 P4.3 | length 281.8
  Top Layer w14: P4.3 1457,1920 1409,1872 1409,1773 LQ_KXXP1.88
PTB23: LQ_KXXP1.87 P4.18 | length 279.1
  Top Layer w14: LQ_KXXP1.87 1456.88,1874.88 1507,1925 1507,2005 1457,2055 P4.18
PTC0: LQ_KXXP1.90 P4.2 | length 279.4
  Top Layer w14: P4.2 1357,1907.5 1312,1862.5 1312,1774 1362,1724 LQ_KXXP1.90
PTC1: LQ_KXXP1.89 P4.17 | length 280
  Top Layer w14: P4.17 1407,2012 1407,1917 1362,1872 LQ_KXXP1.89
PTC2: LQ_KXXP1.92 P4.1 | length 279.4
  Top Layer w14: P4.1 1212,1915 1212,1770 LQ_KXXP1.92
PTC3: LQ_KXXP1.91 P4.16 | length 279.4
  Top Layer w14: P4.16 1307,2010 1307,1907 1262,1862 LQ_KXXP1.91
PTC4: BMQ1.3 LQ_KXXP1.94 P1.1 R39.2 | length 600
  Top Layer w15: R39.2 673,1798 BMQ1.3 P1.1 873,1873 983,1873 1036,1820 LQ_KXXP1.94
PTC5: LQ_KXXP1.93 P1.2 | length 282.6
  Top Layer w15: P1.2 982,1820 1031,1771 1113,1771 LQ_KXXP1.93
PTC6: LQ_KXXP1.96 P1.3 | length 295.7
  Top Layer w15: P1.3 820,1741 849,1770 985,1770 1035,1720 LQ_KXXP1.96
PTC7: LQ_KXXP1.95 P1.4 | length 285.1
  Top Layer w15: P1.4 973,1720 1025,1668 1110,1668 LQ_KXXP1.95
PTC8: LQ_KXXP1.98 P1.5 | length 285.9
  Top Layer w15: P1.5 870,1670 970,1670 1025.91,1614.09 LQ_KXXP1.98
PTC9: LQ_KXXP1.97 P1.6 | length 285.1
  Top Layer w15: P1.6 925,1615 974,1615 1021,1568 1110,1568 LQ_KXXP1.97
PTC10: LQ_KXXP1.100 P1.7 | length 283.4
  Top Layer w15: P1.7 829.94,1520 879.94,1570 973,1570 1023,1520 LQ_KXXP1.100
PTC11: LQ_KXXP1.99 P1.8 | length 283.4
  Top Layer w15: P1.8 962,1520 1012,1470 1112,1470 LQ_KXXP1.99
PTC12: LQ_KXXP1.102 P1.9 R48.1 S1.2 | length 755.4
  Top Layer w15: S1.2 575,1420 P1.9 834,1420 885,1471 963,1471 1014,1420 LQ_KXXP1.102
  Top Layer w20: v4(382,1500) S1.2
PTC13: LQ_KXXP1.101 P1.10 R49.1 S2.2 | length 852.7
  Top Layer w15: S2.2 525.47,1370.47 837.69,1370.47 887.21,1420 P1.10 922,1418 965,1418 1012,1371 1113,1371 LQ_KXXP1.101
  Top Layer w20: v4(383,1340) S2.2
PTC14: LQ_KXXP1.104 P1.11 R52.1 S3.2 | length 780.2
  Top Layer w15: S3.2 635,1320 P1.11 844,1320 895,1371 962,1371 1013,1320 LQ_KXXP1.104
  Top Layer w20: v4(382,1180) S3.2
PTC15: LQ_KXXP1.103 P1.12 R53.1 S4.2 | length 945.7
  Top Layer w14: P1.12 970,1320 1020,1270 1112,1270 LQ_KXXP1.103
  Top Layer w15: S4.2 747.47,1272.47 853.47,1272.47 901,1320 P1.12
  Top Layer w20: v4(382,1020) S4.2
PTC16: LQ_KXXP1.106 P1.13 | length 283.3
  Top Layer w15: P1.13 822,1218 847,1218 897,1268 966,1268 1013.61,1220.39 LQ_KXXP1.106
PTC17: LQ_KXXP1.105 P1.14 | length 283.3
  Top Layer w15: P1.14 962,1220 1012,1170 1112.39,1170 LQ_KXXP1.105
PTC18: LQ_KXXP1.108 P1.15 | length 283.4
  Top Layer w15: P1.15 870,1170 961,1170 1011,1120 LQ_KXXP1.108
PTC19: LQ_KXXP1.107 P1.16 | length 284.2
  Top Layer w15: P1.16 964,1120 1015,1069 1111,1069 LQ_KXXP1.107
PTD0: LQ_KXXP1.110 P1.17 | length 283.4
  Top Layer w15: P1.17 870,1070 966,1070 1016,1020 LQ_KXXP1.110
PTD1: LQ_KXXP1.109 P1.18 | length 284.2
  Top Layer w15: P1.18 965,1020 1016,969 1111,969 LQ_KXXP1.109
PTD2: LQ_KXXP1.112 P1.19 | length 281.8
  Top Layer w15: P1.19 868,968 965,968 1013,920 LQ_KXXP1.112
PTD3: LQ_KXXP1.111 P1.20 | length 285.9
  Top Layer w15: P1.20 963,920 1016,867 1109,867 LQ_KXXP1.111
PTD4: LQ_KXXP1.114 P1.21 | length 285.1
  Top Layer w15: P1.21 872,872 961,872 1013,820 LQ_KXXP1.114
PTD5: LQ_KXXP1.113 P1.22 | length 284.2
  Top Layer w15: P1.22 963,820 1014,769 1111,769 LQ_KXXP1.113
PTD6: LQ_KXXP1.116 P1.23 | length 285.1
  Top Layer w15: P1.23 840,720 892,772 959,772 1011,720 LQ_KXXP1.116
PTD7: LQ_KXXP1.115 P1.24 | length 281.8
  Top Layer w15: P1.24 923,717 963,717 1008,672 1114,672 LQ_KXXP1.115
PTD8: K1.16 LQ_KXXP1.118 P1.25 R32.1 | length 795.7
  Top Layer w15: K1.16 600,840 P1.25 823,620 872,669 958,669 1007,620 LQ_KXXP1.118
  Bottom Layer w20: R32.1 K1.16
PTD9: K1.15 LQ_KXXP1.117 P1.26 R33.1 | length 894.9
  Top Layer w15: K1.15 601,740 772.03,568.97 850.97,568.97 900,618 961,618 1008,571 1113,571 LQ_KXXP1.117
  Bottom Layer w20: R33.1 K1.15
PTD10: K1.14 LQ_KXXP1.120 P1.27 R36.1 | length 755.1
  Top Layer w15: K1.14 619,640 739,520 P1.27 852.53,520 902.53,570 957,570 1007,520 LQ_KXXP1.120
  Bottom Layer w20: R36.1 K1.14
PTD11: K1.13 LQ_KXXP1.119 P1.28 R37.1 | length 853.9
  Top Layer w15: K1.13 637,540 707.53,469.47 846.47,469.47 897,520 961,520 1009,472 1114,472 LQ_KXXP1.119
  Bottom Layer w20: R37.1 K1.13
PTD12: K1.12 LQ_KXXP1.122 P1.29 R38.1 | length 713.7
  Top Layer w15: K1.12 638,440 658,420 P1.29 845,420 895,470 964,470 1014,420 LQ_KXXP1.122
  Bottom Layer w20: R38.1 K1.12
PTD13: K1.11 LQ_KXXP1.121 P1.30 R40.1 | length 838.6
  Top Layer w15: K1.11 730,340 760.97,370.97 846.65,370.97 895.68,420 P1.30 964,420 1014,370 1112,370 LQ_KXXP1.121
  Bottom Layer w20: R40.1 K1.11
PTD14: K1.10 LQ_KXXP1.124 P1.31 R42.1 | length 739.4
  Top Layer w15: P1.31 844,320 895,371 963,371 1014,320 LQ_KXXP1.124
  Top Layer w20: K1.10 740,240 P1.31
  Bottom Layer w20: R42.1 K1.10
PTD15: K1.9 LQ_KXXP1.123 P1.32 R43.1 | length 884.1
  Top Layer w15: P1.32 975,265 1107,265 LQ_KXXP1.123
  Top Layer w20: K1.9 740,140 P1.32
  Bottom Layer w20: R43.1 K1.9
PTE0: LQ_KXXP1.1 P3.1 | length 296.9
  Top Layer w18: P3.1 1304,107 1304,194 1262,236 LQ_KXXP1.1
PTE1: LQ_KXXP1.2 P3.7 | length 296.9
  Top Layer w18: P3.7 1215,202 1215,373 LQ_KXXP1.2
PTE2: LQ_KXXP1.3 P3.2 | length 295.2
  Top Layer w15: P3.2 1402.03,105.03 1402.03,205.03 1362,245.06 LQ_KXXP1.3
PTE3: LQ_KXXP1.4 P3.8 | length 299.4
  Top Layer w18: P3.8 1357,198 1312,243 1312,370 LQ_KXXP1.4
PTE4: LQ_KXXP1.5 P3.3 | length 296.5
  Top Layer w18: P3.3 1503.53,106.53 1503.53,207 1462,248.53 LQ_KXXP1.5
PTE5: LQ_KXXP1.6 P3.9 | length 296.9
  Top Layer w18: P3.9 1457,196 1415,238 1415,373 LQ_KXXP1.6
PTE6: LQ_KXXP1.7 P3.4 | length 295.2
  Top Layer w15: P3.4 1602.03,105.03 1602.03,205.03 1562,245.06 LQ_KXXP1.7
PTE7: LQ_KXXP1.8 P3.10 | length 296.9
  Top Layer w18: P3.10 1557,205.06 1515,247.06 1515,364 1562,411 LQ_KXXP1.8
PTE8: LQ_KXXP1.9 P3.5 | length 295.2
  Top Layer w15: P3.5 1702.03,105.03 1702.03,192.97 1662,233 LQ_KXXP1.9
PTE9: LQ_KXXP1.10 P3.11 | length 296.9
  Top Layer w18: P3.11 1657,196 1615,238 1615,373 LQ_KXXP1.10
PTE10: HW1.3 LQ_KXXP1.11 P3.6 R55.2 | length 1240.1
  Top Layer w18: P3.6 1807,110 ; LQ_KXXP1.11 1762,222 1807,177 1807,110 ; HW1.3 2594,160 2547,113 1810,113 1807,110
  Bottom Layer w18: HW1.3 2600,125.2 R55.2
PTE11: HW2.3 LQ_KXXP1.12 P3.12 R56.2 | length 1013
  Top Layer w18: P3.12 1757,181 1715,223 1715,372.21 LQ_KXXP1.12
  Bottom Layer w18: P3.12 1805,208 2252,208 HW2.3 ; HW2.3@2294,160 HW2.3 ; R56.2 2300,125.2 HW2.3
PTE12: HW3.3 LQ_KXXP1.13 R57.2 | length 344.2
  Top Layer w18: LQ_KXXP1.13 1862,298 HW3.3
  Bottom Layer w18: HW3.3 2000,125.2 R57.2
PTE24: LQ_KXXP1.32 P2.32 | length 282.2
  Top Layer w15: LQ_KXXP1.32 2899,320 2956,263 3040,263 P2.32
PTE25: LQ_KXXP1.33 P2.29 | length 276.4
  Top Layer w15: LQ_KXXP1.33 2812,470 2901,470 2951,420 P2.29
PTE26: LQ_KXXP1.34 P2.30 | length 275.6
  Top Layer w15: LQ_KXXP1.34 2904,420 2953,371 3048,371 P2.30
PTE27: LQ_KXXP1.35 P2.27 | length 277.2
  Top Layer w15: LQ_KXXP1.35 2813,571 2913,571 2964,520 P2.27
PTE28: LQ_KXXP1.36 P2.28 | length 277.2
  Top Layer w15: LQ_KXXP1.36 2914,520 2965,469 3046,469 P2.28
RST: LQ_KXXP1.38 P2.26 | length 277.2
  Top Layer w15: LQ_KXXP1.38 2909,620 2960,569 3046,569 P2.26
VREG: LQ_KXXP1.16
VRH: LQ_KXXP1.25
pads on no net: Designator1.0 Designator1.1 Designator1.2 Designator1.3 Designator1.4 Designator1.5 Designator1.6 Designator1.7

## Polygon pours and split planes (outlines as drawn)
GND on Top Layer "Top Layer-No Net" (solid, remove dead copper, pour order 1000): 450,2905 456.31,2911.31 3452.38,2911.31 3476.69,2911.31 3942,2446 3920,2424 3920,0 0,0 0,1816.29 0,2903 1,2904 2,2905 450,2905
GND on Bottom Layer "Top Layer-No Net" (solid, remove dead copper, pour order 1001): 455.27,2905.01 461.55,2911.29 3444.2,2911.29 3447.71,2911.29 3989,2370 3915.71,2296.71 3915.71,1788.62 3915.71,4.29 3920,0 0,0 0,1816.29 13,1829.29 13,2909 446,2909 450,2905

## Keep-outs
Keep-Out Layer:
  lines w10: 0,0 0,1816.29 450,2905 3452.38,2911.31 3915.71,1788.62 3920,0 0,0

## Other copper
Top Layer:
  text "SDUST" at 3807,1416 h118.11 r270
  text "2015-8" at 3803,1017 h118.11 r270
  text "Breaker" at 3810,601 h118.11 r270

## Silkscreen, mask and mechanical layers (free items; w line width, h text height)
Top Overlay:
  circle w10: c3399.9,2568 r5.1
  circle w10: c2921.9,2622 r5.1
  circle w10: c1369.9,2821 r5.1
  circle w10: c1842.9,2817 r5.1
  circle w10: c1007.9,2632 r5.1
  circle w10: c525.9,2592 r5.1
  circle w10: c2121.9,2821 r5.1
  circle w10: c2597.9,2829 r5.1
  text "GND" at 540,2679 h40
  text "GND" at 3323,2670 h40
  text "5V" at 469,1730.7 h40
  text "GND" at 549,1729 h40
  text "GND" at 654,1726 h40
  text "VCC" at 3394,1392 h40
  text "GND" at 3479,1388 h40
  text "PWM2" at 3487,1120 h40
  text "EN" at 3287,1119 h40
  text "PWM1" at 3360,1119 h40

## Text inside footprints (layer, text, board x,y; h text height)
K1: Top Overlay "Switch" at 480,50 h10
P1: Top Overlay "2" at 855,1932 h50 r270; Top Overlay "1" at 864,1873 h50 r270; Top Overlay "31" at 800,240 h50 r270; Top Overlay "32" at 900,245 h50 r270
P2: Top Overlay "2" at 3068,1909 h50 r270; Top Overlay "1" at 2969,1897 h50 r270; Top Overlay "31" at 2977,240 h50 r270; Top Overlay "32" at 3077,250 h50 r270
P3: Top Overlay "1" at 1157,40 h50; Top Overlay "2" at 1142,145 h50
Q1: Top Overlay "1" at 3670,1066 h59.05 r180; Top Overlay "3" at 3682,885 h59.05 r180
R2: Top Overlay "Register" at 3386,2345 h10 r270